# EAGLE board Power Supply No Slo Start-Cameron (EAGLE 7.1.0)
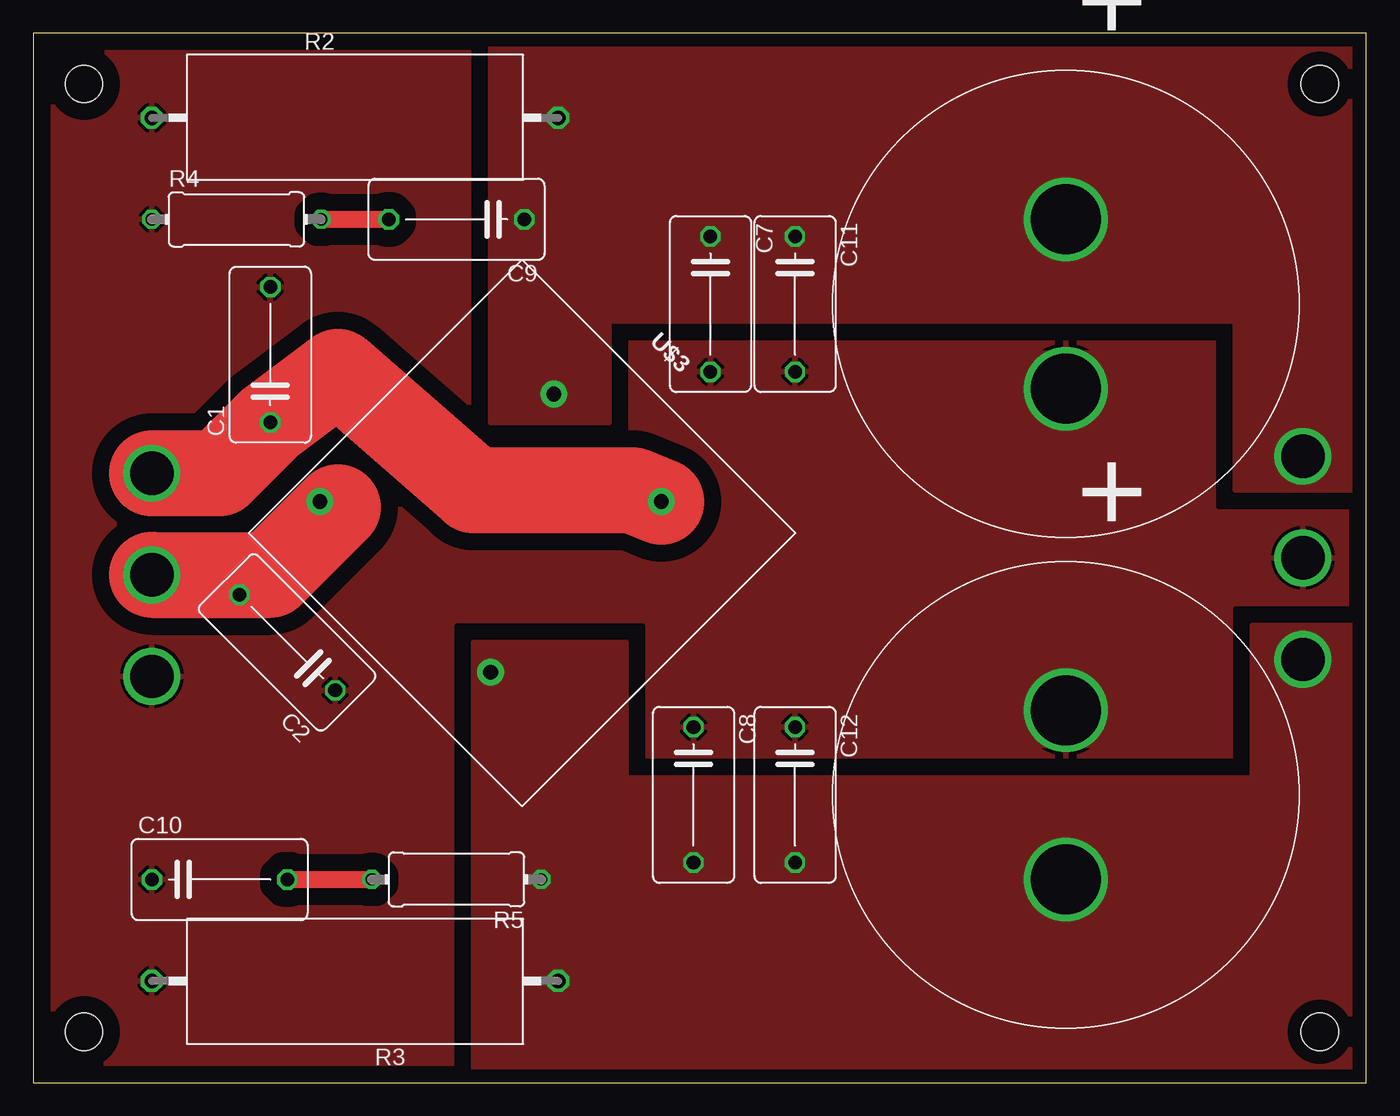
[diagram p0: board, top side]

Size 100 x 78.73 mm. Coordinates in mm from the lower left corner, seen from the top.
Outline: 0,0 100,0 100,78.73 0,78.73 0,0
Copper layers (1*16): Top 0.035mm / dielectric 1.5mm / Bottom 0.035mm
Design rules "default": minimum track width 10mil, minimum drill 24mil, track to track 8mil, track to pad 8mil, pad to pad 8mil, via to via 8mil, smd to smd 8mil, copper to edge 40mil, drill to drill 8mil, minimum pad ring 10mil, minimum via ring 8mil, stop-mask expansion 4mil, vias tented up to drill 0mil, thermal gap 10mil
Holes 2.8 mm at 3.81,3.81 3.81,74.93 96.52,74.93 96.52,3.81

## Footprints (pad centres in the part's own frame; a part is rotated, then mirrored left to right if it is on the bottom)
C102-064X133 = drill 1.016 octagon: 1 -5.08,0; 2 5.08,0
PHI-35 = drill 5.25: + 0,0; - 12.7,0
3PIN_SCREW_EYELET = drill 3.25: P$1 0,0; P$2 7.62,0; P$3 15.24,0
VTA52 = drill 1.1 octagon: 1 -15.24,0; 2 15.24,0
0411/12 = drill 0.914 octagon: 1 -6.35,0; 2 6.35,0
GBPC3510W = drill 1.1 pad 2: AC1 6.97,3.97; AC2 -11.13,-14.13; V+ -4.43,3.97; V- 6.97,-14.13

## Placement (x,y rotation side)
C1  0.1uF  [C102-064X133]  17.78,54.61 90 top
C2  0.1uF  [C102-064X133]  19.05,33.02 135 top
C7  0.1uF  [C102-064X133]  50.8,58.42 270 top
C8  0.1uF  [C102-064X133]  49.53,21.59 270 top
C9  0.1uF  [C102-064X133]  31.75,64.77 180 top
C10  0.1uF  [C102-064X133]  13.97,15.24 0 top
C11  1uF  [C102-064X133]  57.15,58.42 270 top
C12  1uF  [C102-064X133]  57.15,21.59 270 top
C13  15,000uF  [PHI-35]  77.47,27.94 270 top
C19  15,000uF  [PHI-35]  77.47,64.77 270 top
P1  3PIN_3.25MM  [3PIN_SCREW_EYELET]  8.89,45.72 270 top
P2  3PIN_3.25MM  [3PIN_SCREW_EYELET]  95.25,46.99 270 top
R2  2k  [VTA52]  24.13,72.39 0 top
R3  2k  [VTA52]  24.13,7.62 180 top
R4  1  [0411/12]  15.24,64.77 0 top
R5  1  [0411/12]  31.75,15.24 180 top
U$3  GBPC3510W  [GBPC3510W]  39.37,45.72 315 top

## Library data of the parts
C1 C2 C7-C12 R2-R5 = rcl
C13 C19 P1 P2 U$3 = Amplifier_Parts

## Nets
AC1: C1.1 P1.P$1 U$3.AC1
AC2: C2.2 P1.P$2 U$3.AC2
GND: C1.2 C2.1 C7.2 C8.1 C10.1 C11.2 C12.1 C13.+ C19.- P1.P$3 P2.P$2 R2.1 R3.2 R4.1
N$1: C10.2 R5.2
N$2: C9.2 R4.2
VCC: C7.1 C9.1 C11.1 C19.+ P2.P$1 R2.2 U$3.V+
VEE: C8.2 C12.2 C13.- P2.P$3 R3.1 R5.1 U$3.V-

## Tracks (layer width: path | path; a pad name or v marks a point on that pad's centre or on a via)
AC1
  Top 1.27: 47.14,43.64 U$3.AC1
  Top 6.452: U$3.AC1 44.98,44.45 33.02,44.45 22.86,53.34 C1.1 13.97,45.72 P1.P$1
AC2
  Top 1.27: C2.2 16.73,37.05 17.78,38.1 | U$3.AC2 22.78,43.26 22.86,43.18
  Top 6.452: P1.P$2 17.78,38.1 22.86,43.18
GND
  pour Top (isolate 1.27, rank 6): 0,0 100.33,0 100.33,80.01 0,80.01
  pour Top (rank 6, no thermals): 71.12,54.61 71.12,45.72 81.28,45.72 81.28,54.61
  pour Top (rank 6, no thermals): 73.66,33.02 73.66,25.4 82.55,25.4 82.55,33.02
N$1
  Top 1.27: C10.2 R5.2
N$2
  Top 1.27: R4.2 C9.2
VCC
  pour Top (no thermals): 100.33,44.45 90.17,44.45 90.17,57.15 43.18,57.15 43.18,49.53 34.29,49.53 34.29,78.74 100.33,78.74
VEE
  pour Top (no thermals): 100.33,34.29 91.44,34.29 91.44,22.86 44.45,22.86 44.45,33.02 33.02,33.02 33.02,0 100.33,0